# EAGLE board rgb circle (EAGLE 5.11)
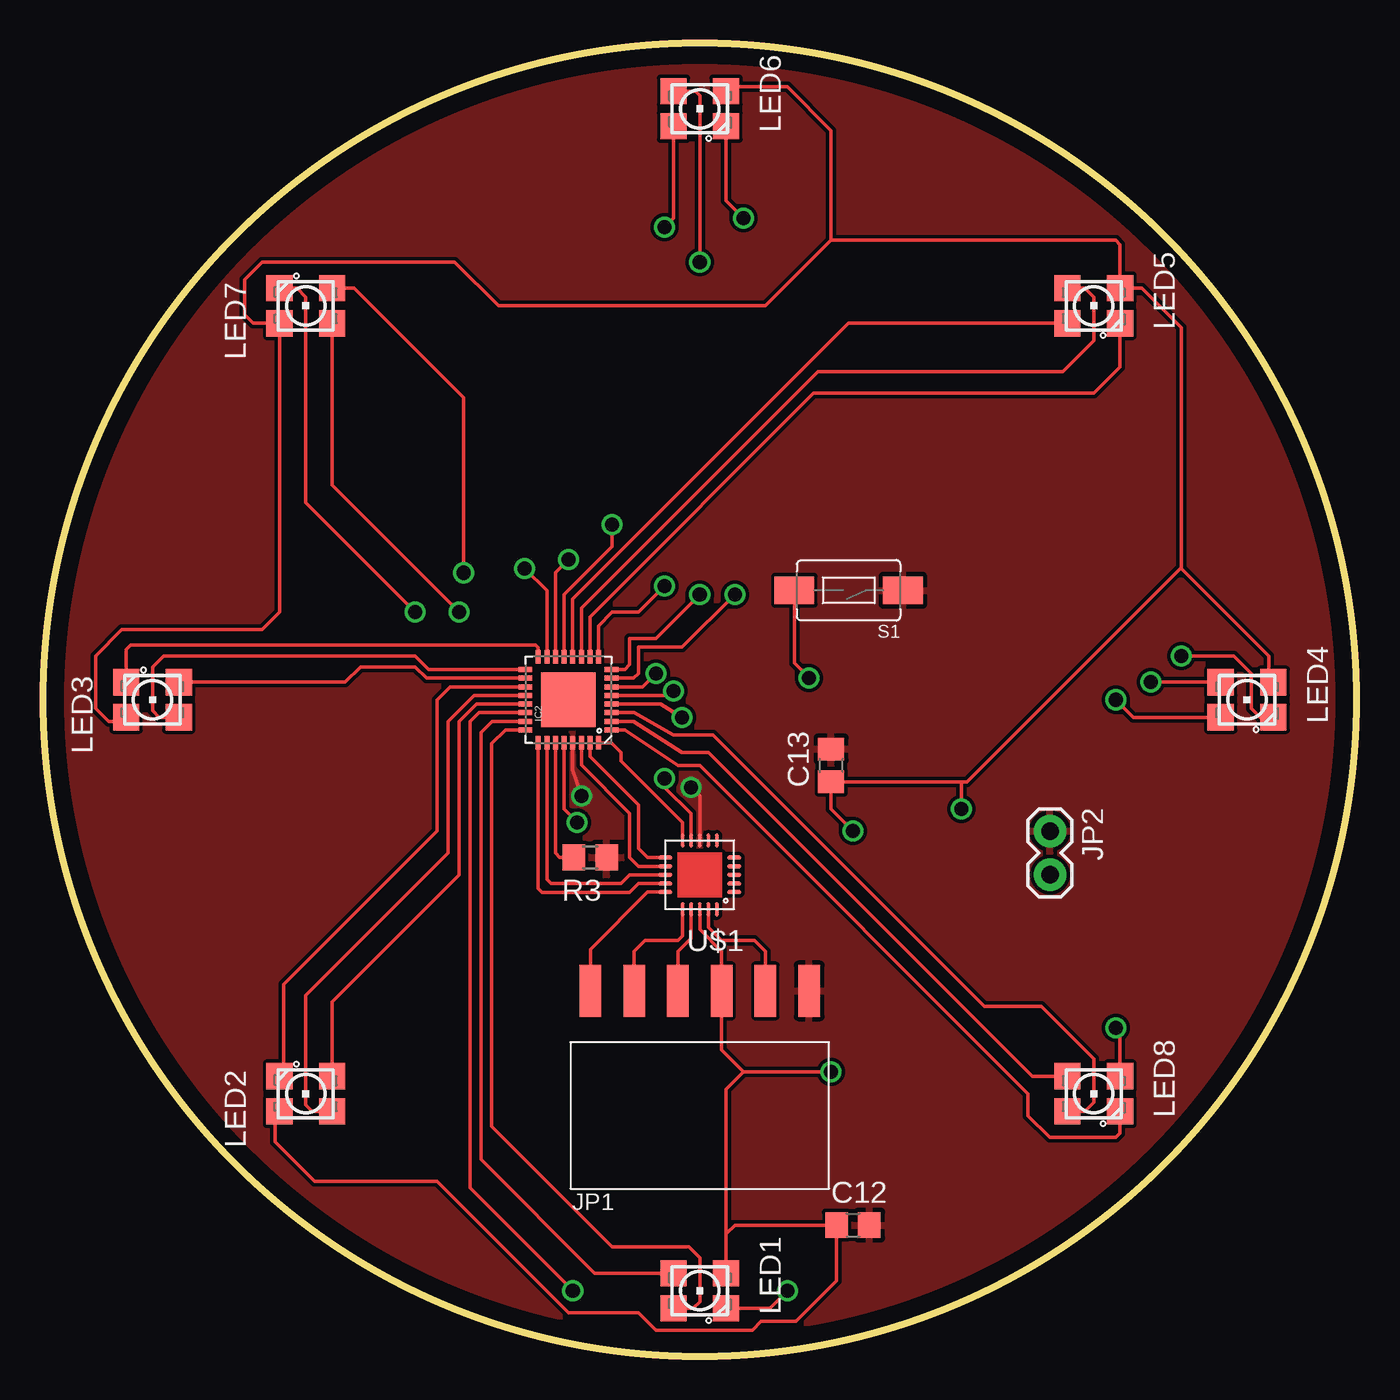
[diagram p0: board, top side]
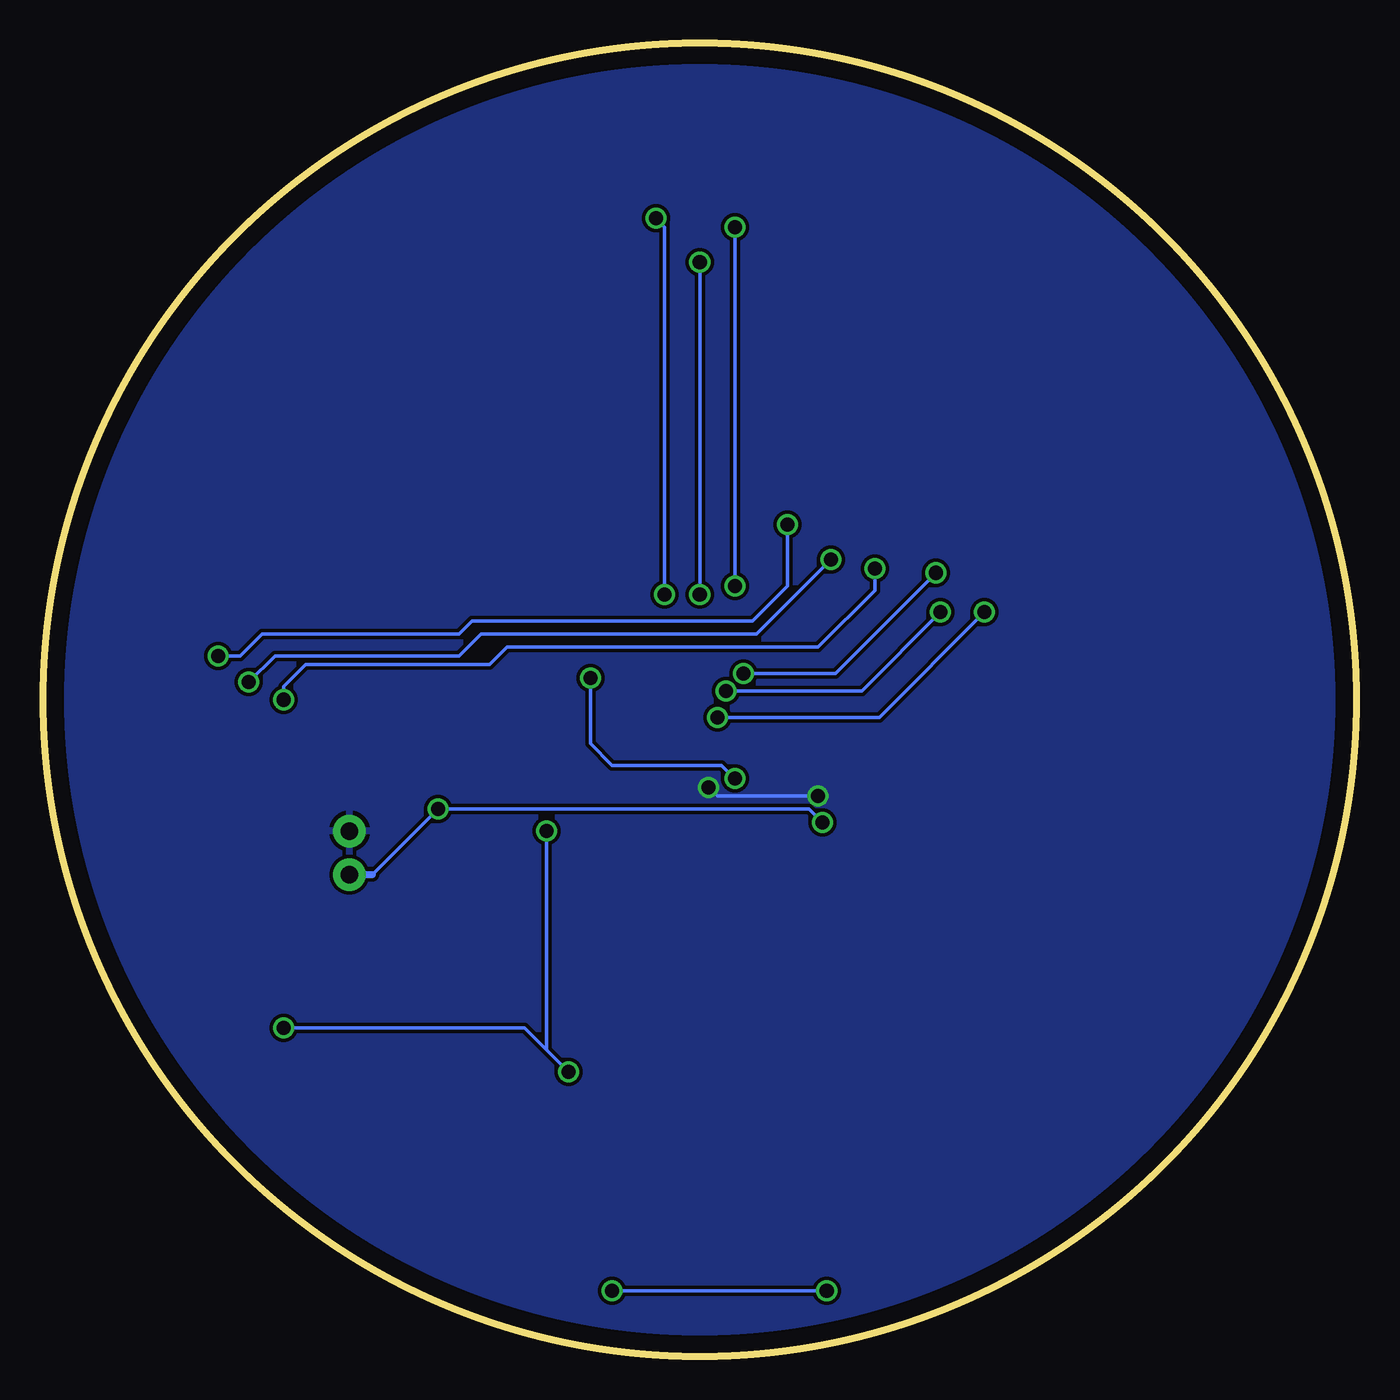
[diagram p1: board, bottom side, seen from below]

Size 76.2 x 76.2 mm. Coordinates in mm from the lower left corner, seen from the top.
Outline: circle at 38.1,38.1 radius 38.1
Copper layers (1*16): Top 0.035mm / dielectric 1.5mm / Bottom 0.035mm
Design rules "default *": minimum track width 8mil, minimum drill 24mil, track to track 8mil, track to pad 8mil, pad to pad 8mil, via to via 8mil, smd to smd 8mil, copper to edge 40mil, drill to drill 8mil, minimum pad ring 10mil, minimum via ring 8mil, stop-mask expansion 4mil, vias tented up to drill 0mil, thermal gap 10mil

## Footprints (pad centres in the part's own frame; a part is rotated, then mirrored left to right if it is on the bottom)
C0805 = smd 1.3 x 1.5: 1 -0.95,0; 2 0.95,0
QFN32_XLP = smd 0.285 x 0.8: 1 -1.75,-2.5; 2 -1.25,-2.5; 3 -0.75,-2.5; 4 -0.25,-2.5; 5 0.25,-2.5; 6 0.75,-2.5; 7 1.25,-2.5; 8 1.75,-2.5; 17 1.75,2.5; 18 1.25,2.5; 19 0.75,2.5; 20 0.25,2.5; 21 -0.25,2.5; 22 -0.75,2.5; 23 -1.25,2.5; 24 -1.75,2.5 | smd 0.8 x 0.285: 9 2.5,-1.75; 10 2.5,-1.25; 11 2.5,-0.75; 12 2.5,-0.25; 13 2.5,0.25; 14 2.5,0.75; 15 2.5,1.25; 16 2.5,1.75; 25 -2.5,1.75; 26 -2.5,1.25; 27 -2.5,0.75; 28 -2.5,0.25; 29 -2.5,-0.25; 30 -2.5,-0.75; 31 -2.5,-1.25; 32 -2.5,-1.75 | smd 3.15 x 3.15: EP 0,0
1X06-SMD-FEMALE-V2 = smd 1.25 x 3: 1 6.35,3.425; 2 3.81,3.425; 3 1.27,3.425; 4 -1.27,3.425; 5 -3.81,3.425; 6 -6.35,3.425
1X02 = drill 1.016 pad 1.88 round: 1 0,0; 2 2.54,0
PLCC4 = smd 1.524 x 1.524: 1 -1.524,1.016; 2 -1.524,-1.016; 3 1.524,-1.016; 4 1.524,1.016
R0805 = smd 1.3 x 1.5: 1 -0.95,0; 2 0.95,0
TACTILE-SWITCH-1101NE = smd 2.3 x 1.6: P$1 -3.15,0; P$2 3.15,0
MLF20 = smd 0.8 x 0.23: P$1 -2,1; P$2 -2,0.5; P$3 -2,0; P$4 -2,-0.5; P$5 -2,-1; P$11 2,-1; P$12 2,-0.5; P$13 2,0; P$14 2,0.5; P$15 2,1 | smd 0.23 x 0.8: P$6 -1,-2; P$7 -0.5,-2; P$8 0,-2; P$9 0.5,-2; P$10 1,-2; P$16 1,2; P$17 0.5,2; P$18 0,2; P$19 -0.5,2; P$20 -1,2

## Placement (x,y rotation side)
C12  .1uF  [C0805]  46.99,7.62 0 top
C13  .1uF  [C0805]  45.72,34.29 90 top
IC2  TLC5947XLP  [QFN32_XLP]  30.48,38.1 90 top
JP1  [1X06-SMD-FEMALE-V2]  38.1,17.78 0 top
JP2  [1X02]  58.42,30.48 270 top
LED1  CLVBA-FK  [PLCC4]  38.1,3.81 180 top
LED2  CLVBA-FK  [PLCC4]  15.24,15.24 0 top
LED3  CLVBA-FK  [PLCC4]  6.35,38.1 0 top
LED4  CLVBA-FK  [PLCC4]  69.85,38.1 180 top
LED5  CLVBA-FK  [PLCC4]  60.96,60.96 180 top
LED6  CLVBA-FK  [PLCC4]  38.1,72.39 180 top
LED7  CLVBA-FK  [PLCC4]  15.24,60.96 0 top
LED8  CLVBA-FK  [PLCC4]  60.96,15.24 180 top
R3  [R0805]  31.75,28.96 180 top
S1  SWITCH-MOMENTARY-2-SMD-1101NE  [TACTILE-SWITCH-1101NE]  46.74,44.45 180 top
U$1  TINY2313-*M*  [MLF20]  38.1,27.94 180 top

## Library data of the parts
C12 C13 R3 = rcl
IC2 = slice_noshift
JP1 = 8x8
JP2 = SparkFun
LED1-LED8 = rf_blinky
S1 = CPLD_Class
U$1 = NSL_Cylon

## Nets
BLANK: IC2.30 U$1.P$12
BUTTON1: S1.P$2 U$1.P$9
COL1: IC2.1 LED8.1
COL2: IC2.2 LED8.3
COL3: IC2.3 LED8.4
COL4: IC2.4 LED7.1
COL5: IC2.5 LED7.3
COL6: IC2.6 LED7.4
COL7: IC2.7 LED6.1
COL8: IC2.8 LED6.3
COL9: IC2.9 LED6.4
COL10: IC2.10 LED5.1
COL11: IC2.11 LED5.3
COL12: IC2.12 LED5.4
COL13: IC2.13 LED4.1
COL14: IC2.14 LED4.3
COL15: IC2.15 LED4.4
COL16: IC2.16 LED3.1
COL17: IC2.17 LED3.3
COL18: IC2.18 LED3.4
COL19: IC2.19 LED2.1
COL20: IC2.20 LED2.3
COL21: IC2.21 LED2.4
COL22: IC2.22 LED1.1
COL23: IC2.23 LED1.3
COL24: IC2.24 LED1.4
GND: C12.2 C13.2 IC2.29 JP1.1 JP2.1 R3.1 S1.P$1 U$1.P$8
MISO: JP1.5 U$1.P$16
MOSI: JP1.6 U$1.P$15
N$13: IC2.27 R3.2
RST: JP1.2 U$1.P$19
SCK: JP1.4 U$1.P$17
SCLK: IC2.31 U$1.P$11
SIN: IC2.32 U$1.P$10
SOUT: IC2.25 U$1.P$14
VCC: C12.1 C13.1 IC2.28 JP1.3 JP2.2 LED1.2 LED2.2 LED3.2 LED4.2 LED5.2 LED6.2 LED7.2 LED8.2 U$1.P$18
XLAT: IC2.26 U$1.P$13

## Tracks (layer width: path | path; a pad name or v marks a point on that pad's centre or on a via)
BLANK
  Top 0.203: IC2.30 31.23,34.3 34.04,31.5 34.04,28.96 34.55,28.44 U$1.P$12
BUTTON1  (via drill 0.81)
  Top 0.203: v36.07,33.53 36.07,33.02 37.59,31.5 U$1.P$9 | S1.P$2 43.59,40.23 v44.45,39.37
  Bottom 0.203: v44.45,39.37 44.45,35.56 43.18,34.29 36.83,34.29 v36.07,33.53
COL1
  Top 0.203: IC2.1 33.75,36.35 36.83,34.29 38.1,34.29 57.15,15.24 57.15,13.97 58.42,12.7 62.23,12.7 62.48,12.95 LED8.1
COL2
  Top 0.203: IC2.2 34.27,36.85 37.08,35.05 38.61,35.05 57.4,16.26 LED8.3
COL3
  Top 0.203: IC2.3 34.28,37.35 36.58,36.07 38.86,36.07 54.61,20.32 57.91,20.32 60.96,17.27 60.96,14.73 60.45,14.22 LED8.4
COL4  (via drill 0.81)
  Top 0.203: LED7.1 14.73,61.98 15.24,61.47 15.24,49.53 v21.59,43.18 | IC2.4 35.81,37.85 v37.08,37.08
  Bottom 0.203: v37.08,37.08 27.69,37.08 v21.59,43.18
COL5  (via drill 0.81)
  Top 0.203: v24.13,43.18 16.76,50.55 LED7.3 | IC2.5 36.32,38.35 v36.58,38.61
  Bottom 0.203: v36.58,38.61 28.7,38.61 v24.13,43.18
COL6  (via drill 0.81)
  Top 0.203: LED7.4 18.03,61.98 24.38,55.63 v24.38,45.47 | IC2.6 34.79,38.85 v35.56,39.62
  Bottom 0.203: v35.56,39.62 30.23,39.62 v24.38,45.47
COL7  (via drill 0.81)
  Top 0.203: IC2.7 34.27,39.35 34.54,39.62 34.54,41.15 37.08,41.15 v40.13,44.2 | v40.64,66.04 39.62,67.06 LED6.1
  Bottom 0.203: v40.13,44.2 40.13,65.53 v40.64,66.04
COL8  (via drill 0.81)
  Top 0.203: IC2.8 33.75,39.85 34.04,40.13 34.04,41.66 35.56,41.66 v38.1,44.2 | LED6.3 37.85,73.41 38.1,73.15 v38.1,63.5
  Bottom 0.203: v38.1,44.2 v38.1,63.5
COL9  (via drill 0.81)
  Top 0.203: IC2.9 32.23,42.39 33.02,43.18 34.54,43.18 v36.07,44.7 | v36.07,65.53 36.58,66.04 LED6.4
  Bottom 0.203: v36.07,44.7 v36.07,65.53
COL10
  Top 0.203: IC2.10 31.73,42.91 44.7,55.88 60.96,55.88 62.48,57.4 LED5.1
COL11
  Top 0.203: IC2.11 31.23,43.42 44.96,57.15 59.18,57.15 60.96,58.93 60.96,61.47 60.45,61.98 LED5.3
COL12
  Top 0.203: IC2.12 30.73,43.94 46.74,59.94 LED5.4
COL13  (via drill 0.81)
  Top 0.203: IC2.13 30.23,44.2 33.02,46.99 v33.02,48.26 | LED4.1 70.61,37.08 70.1,37.59 70.1,39.62 69.09,40.64 v66.04,40.64
  Bottom 0.203: v66.04,40.64 64.77,40.64 63.5,41.91 52.07,41.91 51.31,42.67 35.05,42.67 33.02,44.7 v33.02,48.26
COL14  (via drill 0.81)
  Top 0.203: IC2.14 29.73,45.48 v30.48,46.23 | v64.26,39.12 LED4.3
  Bottom 0.203: v30.48,46.23 34.8,41.91 50.8,41.91 52.07,40.64 62.74,40.64 v64.26,39.12
COL15  (via drill 0.81)
  Top 0.203: LED4.4 63.25,37.08 v62.23,38.1 | IC2.15 29.23,44.43 v27.94,45.72
  Bottom 0.203: v62.23,38.1 62.23,38.86 60.96,40.13 50.29,40.13 49.28,41.15 31.24,41.15 27.94,44.45 v27.94,45.72
COL16
  Top 0.203: IC2.16 28.73,41.12 28.58,41.27 5.08,41.27 4.83,41.02 LED3.1
COL17
  Top 0.203: IC2.17 22.38,39.85 21.59,40.64 6.99,40.64 6.35,40.01 6.35,37.47 6.73,37.08 LED3.3
COL18
  Top 0.203: IC2.18 22.25,39.35 21.59,40.01 18.42,40.01 17.53,39.12 LED3.4
COL19
  Top 0.203: IC2.19 23.61,38.85 22.86,38.1 22.86,30.48 13.97,21.59 13.97,16.51 LED2.1
COL20
  Top 0.203: IC2.20 25.02,38.35 23.5,36.83 23.5,29.21 15.24,20.96 15.24,14.61 15.62,14.22 LED2.3
COL21
  Top 0.203: IC2.21 25.15,37.85 24.13,36.83 24.13,27.94 16.76,20.57 LED2.4
COL22  (via drill 0.81)
  Top 0.203: IC2.22 25.29,37.35 24.77,36.83 24.77,9.78 v30.73,3.81 | LED1.1 42.16,2.79 v43.18,3.81
  Bottom 0.203: v30.73,3.81 v43.18,3.81
COL23
  Top 0.203: IC2.23 26.05,36.85 25.4,36.2 25.4,11.43 32,4.83 LED1.3
COL24
  Top 0.203: IC2.24 26.83,36.35 26.04,35.56 26.04,13.34 33.02,6.35 37.47,6.35 38.1,5.72 38.1,3.18 37.72,2.79 LED1.4
GND  (via drill 0.81)
  Top 0.203: IC2.29 30.73,34.04 v31.24,32.51 | v37.59,33.02 38.1,32.51 U$1.P$8
  Bottom 0.203: v31.24,32.51 37.08,32.51 v37.59,33.02
  pour Bottom: -6.35,82.55 82.55,82.55 82.55,-6.35 -6.35,-6.35
  pour Top: -6.35,-6.35 -6.35,82.55 82.55,82.55 82.55,-6.35
MISO
  Top 0.203: JP1.5 34.29,23.5 34.93,24.13 36.83,24.13 37.1,24.4 U$1.P$16
MOSI
  Top 0.203: U$1.P$15 35.07,26.94 31.75,23.62 JP1.6
N$13
  Top 0.203: IC2.27 29.73,29.2 29.97,28.96 R3.2
RST
  Top 0.203: U$1.P$19 38.6,24.9 39.37,24.13 41.27,24.13 41.91,23.5 JP1.2
SCK
  Top 0.203: U$1.P$17 37.6,24.27 36.83,23.5 JP1.4
SCLK
  Top 0.203: U$1.P$11 35.07,28.94 34.54,29.46 34.54,32 31.73,34.82 IC2.31
SIN
  Top 0.203: IC2.32 32.98,35.6 33.53,35.05 33.53,34.54 37.1,30.97 U$1.P$10
SOUT
  Top 0.203: U$1.P$14 34.55,27.44 34.04,26.92 28.96,26.92 28.73,27.15 IC2.25
VCC  (via drill 0.81)
  Top 0.203: U$1.P$18 38.1,24.77 39.37,23.5 JP1.3 39.37,17.78 40.64,16.51 | LED3.2 4.57,36.83 3.81,36.83 3.05,37.59 3.05,40.64 4.57,42.16 12.7,42.16 13.72,43.18 LED7.2 12.19,59.94 11.68,60.45 11.68,62.48 12.7,63.5 23.88,63.5 26.42,60.96 41.91,60.96 45.72,64.77 | LED2.2 13.46,13.97 13.46,12.45 15.75,10.16 22.86,10.16 30.48,2.54 34.54,2.54 35.56,1.52 41.15,1.52 41.66,2.03 43.69,2.03 46.04,4.38 C12.1 40.13,7.62 39.62,7.11 LED1.2 39.62,15.49 40.64,16.51 | LED6.2 39.88,73.66 43.18,73.66 45.72,71.12 45.72,64.77 | LED4.2 71.12,39.37 71.12,40.64 66.04,45.72 | 53.34,33.34 C13.1 45.72,31.75 v46.99,30.48 | 53.34,33.34 53.61,33.34 65.99,45.72 66.04,45.72 | v45.72,16.51 40.64,16.51 | IC2.28 30.23,31.75 v30.99,30.99 | 45.72,64.77 62.23,64.77 62.48,64.52 LED5.2 63.75,61.98 66.04,59.69 66.04,45.72 | v53.29,31.75 53.29,33.29 53.34,33.34 | LED8.2 62.48,18.8 v62.23,19.05
  Bottom 0.203: v30.99,30.99 31.75,31.75 v53.29,31.75 57.11,27.94 | v46.99,30.48 46.99,17.78 | 46.99,17.78 v45.72,16.51 | v62.23,19.05 48.26,19.05 46.99,17.78
  Bottom 0.406: 57.11,27.94 JP2.2
XLAT
  Top 0.203: U$1.P$13 34.04,27.94 33.53,27.43 29.46,27.43 29.23,27.67 IC2.26